# Altium PCB SmartIMU__Pcb.PcbDoc
Units mil, origin at the board's own origin, x right, y up, seen from the top; angles counter-clockwise.
Board outline 680 x 545 mil, 2 copper layers (Top Layer, Bottom Layer); 42 components, 40 nets, 137 pads, 49 vias.
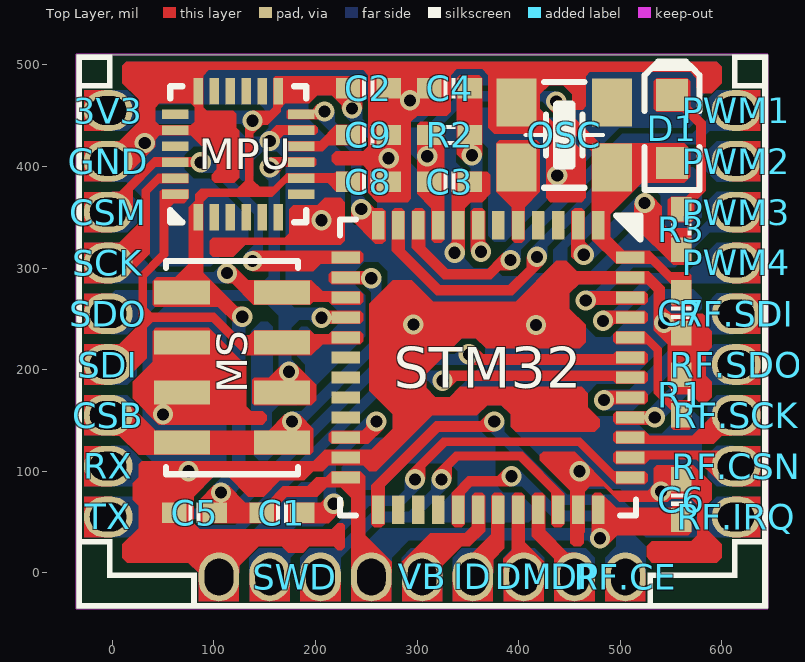
[diagram p0: Top Layer view]
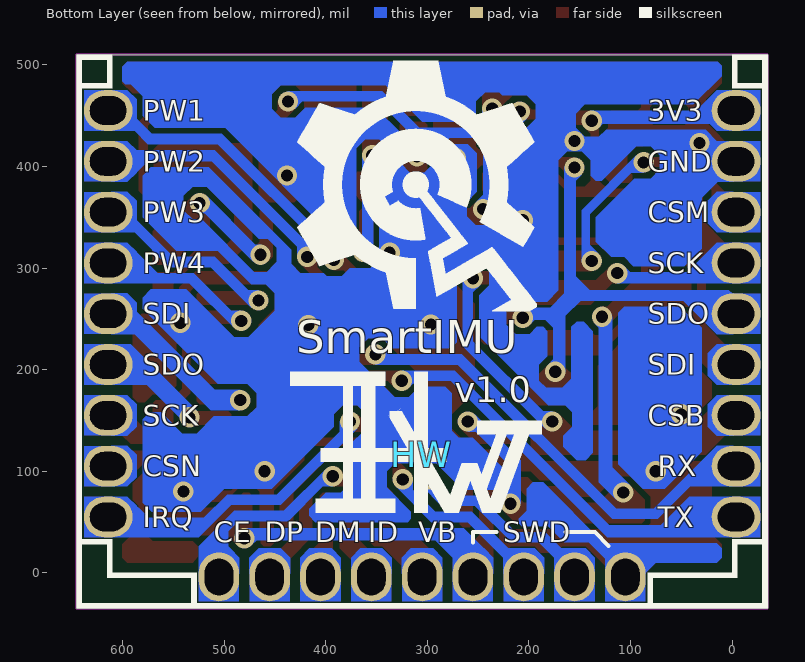
[diagram p1: Bottom Layer view, seen from below]
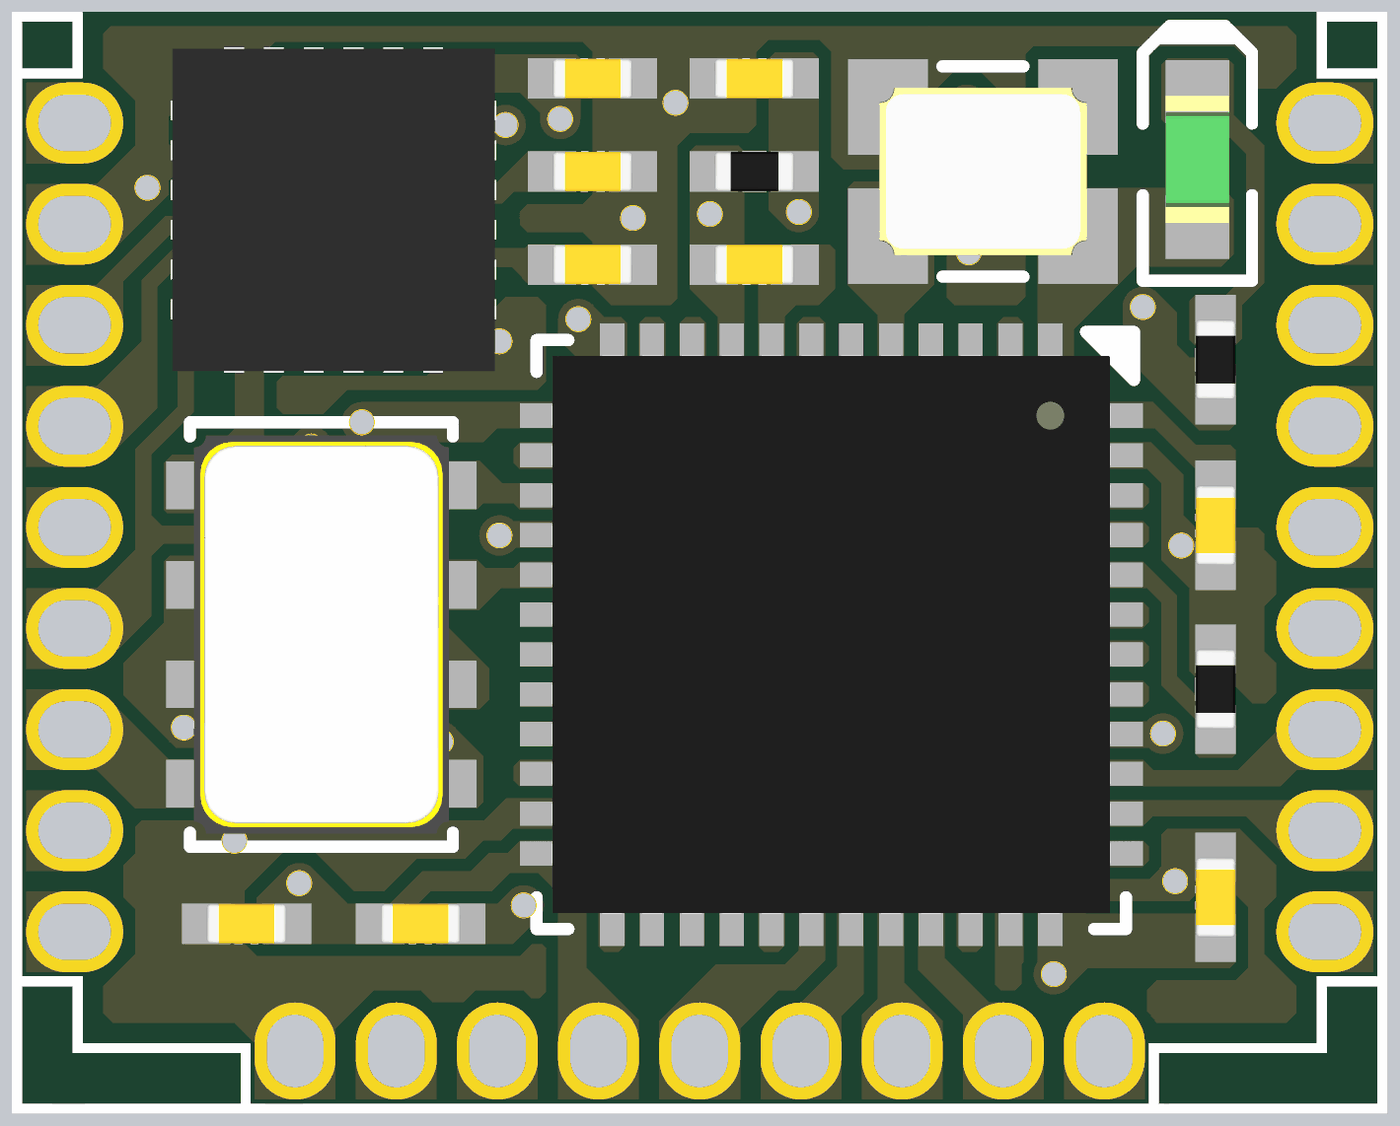
[diagram p2: 3D render of the assembled board from above, using the file's embedded part models]

## Layer stack, top to bottom
Top Solder: solder mask 0.4, Solder Resist, Dk 3.5
Top Layer: signal copper 1.4
Dielectric1: dielectric 12.6, FR-4, Dk 4.8
Bottom Layer: signal copper 1.4
Bottom Solder: solder mask 0.4, Solder Resist, Dk 3.5

## Board outline
-35,-35 645,-35 645,510 -35,510

## Design rules (kind name [scope] priority, off if disabled: settings)
Clearance ClearancePolygon [InPolygon] p1: gap=8
Clearance [All] p2: gap=6
ComponentClearance [All] p1: gap=0 collisioncheckmode=3 verticalgap=0 showdistances=FALSE
HoleToHoleClearance [All] p1: gap=6 allowstackedmicrovias=TRUE
MinimumSolderMaskSliver [All] p1: minsoldermaskwidth=5
PlaneConnect [All] p1: planeconnectstyle=Direct reliefexpansion=20 reliefentries=4 reliefconductorwidth=10 reliefairgap=10
PolygonConnect [All] p1: connectstyle=Direct reliefconductorwidth=10 reliefentries=4 polygonreliefangle="90 Angle" airgapwidth=10
RoutingVias [All] p1: holewidth=12 width=20 viastyle="Through Hole" minholewidth=12 minwidth=20 maxholewidth=28 maxwidth=50
SilkToSilkClearance [All] p1: silktosilkclearance=0
SilkToSolderMaskClearance [IsPad] p1: minsilkscreentomaskgap=1.5 clearancetoexposedcopper=TRUE
SolderMaskExpansion [All] p1: expansion=0
UnConnectedPin [All] p1 off:
Width [All] p1: maxlimit=20 minlimit=6 preferedwidth=10
23 further rules are at their usual default settings.

## Components (designator, comment, footprint, x,y, rotation, side; value= is the part's Value field where it differs from the comment)
3V3 "Pad1X1_1.27" Pad1X1_1.27 0,455 r0 top locked
C1 "Cap_0402" CAP_0402 167,59 r180 top locked
C2 "Cap_0402" CAP_0402 252,477 r0 top locked
C3 "Cap_0402" CAP_0402 332,385 r0 top locked
C4 "Cap_0402" CAP_0402 332,477 r180 top locked
C5 "Cap_0402" CAP_0402 81,59 r180 top locked
C6 "Cap_0402" CAP_0402 560,72 r90 top locked
C7 "Cap_0402" CAP_0402 560,256 r270 top locked
C8 "Cap_0402" CAP_0402 252,385 r0 top locked
C9 "Cap_0402" CAP_0402 252,431 r0 top locked
CSB "Pad1X1_1.27" Pad1X1_1.27 0,155 r0 top locked
CSM "Pad1X1_1.27" Pad1X1_1.27 0,355 r0 top locked
D1 "LED_0603_GREEN" LED_0603_GREEN 551,437 r90 top locked
DM "Pad1X1_1.27" Pad1X1_1.27 405,0 r90 top locked
DP "Pad1X1_1.27" Pad1X1_1.27 455,0 r90 top locked
GND "Pad1X1_1.27" Pad1X1_1.27 0,405 r0 top locked
HW "HW" Logo_HW_v2.0 306,116 r180 bottom
ID "Pad1X1_1.27" Pad1X1_1.27 355,0 r90 top locked
MPU "MPU9250" MPU9250 124,412 r90 top locked
MS "MS5611" MS5611 118,202 r0 top locked
OSC "OSC_3225" OSC_3225 445,431 r180 top locked
PWM1 "Pad1X1_1.27" Pad1X1_1.27 610,455 r180 top locked
PWM2 "Pad1X1_1.27" Pad1X1_1.27 610,405 r180 top locked
PWM3 "Pad1X1_1.27" Pad1X1_1.27 610,355 r180 top locked
PWM4 "Pad1X1_1.27" Pad1X1_1.27 610,305 r180 top locked
R1 "Res_0402" RES_0402 560,175 r270 top locked
R2 "Res_0402" RES_0402 332,431 r180 top locked
R3 "Res_0402" RES_0402 560,338 r270 top locked
RF.CE "Pad1X1_1.27" Pad1X1_1.27 505,0 r90 top locked (schematic designator NRF_CE)
RF.CSN "Pad1X1_1.27" Pad1X1_1.27 610,105 r180 top locked
RF.IRQ "Pad1X1_1.27" Pad1X1_1.27 610,55 r180 top locked
RF.SCK "Pad1X1_1.27" Pad1X1_1.27 610,155 r180 top locked
RF.SDI "Pad1X1_1.27" Pad1X1_1.27 610,255 r180 top locked
RF.SDO "Pad1X1_1.27" Pad1X1_1.27 610,205 r180 top locked
RX "Pad1X1_1.27" Pad1X1_1.27 0,105 r0 top locked
SCK "Pad1X1_1.27" Pad1X1_1.27 0,305 r0 top locked
SDI "Pad1X1_1.27" Pad1X1_1.27 0,205 r0 top locked
SDO "Pad1X1_1.27" Pad1X1_1.27 0,255 r0 top locked
STM32 "STM32F401C" STM32_QFN48 370,202 r270 top locked
SWD "Pad1X4_1.27_SWD" Pad1X4_1.27 255,0 r180 top locked
TX "Pad1X1_1.27" Pad1X1_1.27 0,55 r0 top locked
VB "Pad1X1_1.27" Pad1X1_1.27 305,0 r90 top locked

## Footprints (in the part's own frame and the unit in brackets; to place one, negate y for a bottom-side part, rotate by r counter-clockwise, add the part's x,y. Pads: shape width x height; smd on the part's side, far side on the other; paste and mask are expansions set on the pad)
CAP_0402 [mil] "Chip Capacitor, Body 1.0x0.5mm, 0402, IPC Medium Density"
  rect 24x20 smd: 1(-20,0) 2(20,0)
  Top Layer pour cut-out: -7.87,13.78 7.87,13.78 7.87,-13.78 -7.87,-13.78
  silkscreen extent -6,-10 6,10, body extent -20,-10 20,10, height 22
LED_0603_GREEN [mm] "Chip Capacitor, 2-Leads, Body 1.6x0.8mm, IPC Medium Density"
  rect 0.8x0.8 smd: 1(-0.85,0) 2(0.85,0)
  Top Layer pour cut-out: -0.5,0.5 0.5,0.5 0.5,-0.5 -0.5,-0.5
  silkscreen extent -1.52,-0.69 1.68,0.69, body extent -0.8,-0.4 0.8,0.4, height 0.75
Logo_HW_v2.0 [mil]
  silkscreen extent -129,-57 119,82
MPU9250 [mil] "QFN, 24-Leads, Body 3.00x3.00mm, Pitch 0.40mm, Thermal Pad 1.54x1.70mm, IPC Medium Density"
  rect 26x9 smd: 1(-62.01,39.37) 2(-62.01,23.62) 3(-62.01,7.87) 4(-62.01,-7.87) 5(-62.01,-23.62) 6(-62.01,-39.37) 13(62.01,-39.37) 14(62.01,-23.62) 15(62.01,-7.87) 16(62.01,7.87) 17(62.01,23.62) 18(62.01,39.37)
  rect 9x26 smd: 7(-39.37,-62.01) 8(-23.62,-62.01) 9(-7.87,-62.01) 10(7.87,-62.01) 11(23.62,-62.01) 12(39.37,-62.01) 19(39.37,62.01) 20(23.62,62.01) 21(7.87,62.01) 22(-7.87,62.01) 23(-23.62,62.01) 24(-39.37,62.01)
  silkscreen extent -67,-67 67,67, body extent -81,-81 81,81, height 31
MS5611 [mm] "QFN, 8-Leads, Body 5.00x3.00mm, Pitch 1.25mm/0.00mm, Thermal Pad 4.35x0.00mm, IPC Medium Density"
  rect 1.4x0.6 smd: 1(-1.25,1.875) 2(-1.25,0.625) 3(-1.25,-0.625) 4(-1.25,-1.875) 5(1.25,-1.875) 6(1.25,-0.625) 7(1.25,0.625) 8(1.25,1.875)
  silkscreen extent -1.65,-2.67 1.65,2.67, body extent -1.6,-2.5 1.6,2.5, height 1
OSC_3225 [mil] "Molded Capacitor, 2-Leads, Body 5.0x3.2mm, IPC Medium Density"
  rect 39.37x47.24 smd: 1(-47,-32) 2(47,-32) 3(47,32) 4(-47,32)
  silkscreen extent -38,-52 38,52, body extent -51,-41 51,41, height 22
Pad1X1_1.27 [mil] "Connector; Header; 2 Position"
  oval 48x40 hole 28 slot 36 at 0 deg mask+0: 1(-4,0)
  Multi-Layer region: -28,-20 0,-20 0,20 -28,20
Pad1X4_1.27 [mil] "Connector; Header; 2 Position"
  oval 40x48 hole 28 slot 36 at 90 deg mask+0: 1(0,4) 2(50,4) 3(100,4) 4(150,4)
  Multi-Layer region: -20,28 -20,0 20,0 20,28
  Multi-Layer region: 30,28 30,0 70,0 70,28
  Multi-Layer region: 80,28 80,0 120,0 120,28
  Multi-Layer region: 130,28 130,0 170,0 170,28
RES_0402 [mil] "Chip Resistor, Body 1.0x0.5mm, EIA 0402, IPC Medium Density"
  rect 24x20 smd: 1(-20,0) 2(20,0)
  Top Layer pour cut-out: -7.87,13.78 7.87,13.78 7.87,-13.78 -7.87,-13.78
  silkscreen extent -6,-10 6,10, body extent -20,-10 20,10, height 16
STM32_QFN48 [mil] "QFN, 48-Leads, Body 7.00x7.00mm, Pitch 0.50mm, Thermal Pad 5.80x5.80mm, IPC Medium Density"
  rect 28x12 smd: 1(-140,108.27) 2(-140,88.58) 3(-140,68.9) 4(-140,49.21) 5(-140,29.53) 6(-140,9.84) 7(-140,-9.84) 8(-140,-29.53) 9(-140,-49.21) 10(-140,-68.9) 11(-140,-88.58) 12(-140,-108.27) 25(140,-108.27) 26(140,-88.58) 27(140,-68.9) 28(140,-49.21) 29(140,-29.53) 30(140,-9.84) 31(140,9.84) 32(140,29.53) 33(140,49.21) 34(140,68.9) 35(140,88.58) 36(140,108.27)
  rect 12x28 smd: 13(-108.27,-140) 14(-88.58,-140) 15(-68.9,-140) 16(-49.21,-140) 17(-29.53,-140) 18(-9.84,-140) 19(9.84,-140) 20(29.53,-140) 21(49.21,-140) 22(68.9,-140) 23(88.58,-140) 24(108.27,-140) 37(108.27,140) 38(88.58,140) 39(68.9,140) 40(49.21,140) 41(29.53,140) 42(9.84,140) 43(-9.84,140) 44(-29.53,140) 45(-49.21,140) 46(-68.9,140) 47(-88.58,140) 48(-108.27,140)
  silkscreen extent -150,-146 146,150, body extent -138,-138 138,138, height 31

## Part data
3V3 CSB CSM DM DP GND ID PWM1 PWM2 PWM3 PWM4 RF.CE RF.CSN RF.IRQ RF.SCK RF.SDI RF.SDO RX SCK SDI SDO SWD TX VB: "Header"
C1 C2 C3 C4 C5 C6 C7 C8 C9: "Capacitor"
D1: "LED"
HW: "Logo"
MPU MS: "Sensor"
OSC: "Crystal Oscillator"
R1 R2 R3: "Resistor"
STM32: "MCU"

## Via types
v1: diameter 20, hole 12, Top Layer to Bottom Layer, 49 vias

## Nets (pads, with @x,y where several pads share a name; then routed paths per layer and width w, separated by ;. In a path a pad name is that pad's centre, name@x,y a point inside that pad or via, vN(x,y) a via of type N, cw(c..) or ccw(c..) an arc to the next point about the centre after c; other vN are vias at no path point)
3V3: 3V3.1 C1.2 C2.1 C3.1 C5.1 C6.1 C7.1 C8.1 D1.1 MPU.1 MPU.8 MPU.13 MS.1 OSC.4 R2.2 STM32.1 STM32.9 STM32.24 STM32.36 STM32.48 SWD.1 | length 1839.1
  Top Layer w6: MPU.1 84.63,364.47 95.16,375 158,375 170.38,387.38 MPU.8@186.01,387.38 ; 136,375 v1@136,445 ; v1@138,450 150.5,445 163,457.5 MPU.13@163,472.41
  Top Layer w8: MS.1 85,292.03 MPU.1@85,348.5 ; MPU.8 C8.1@230.94,388.38 ; STM32.48 529.73,310.27 560,280 C7.1@560,275.69
  Top Layer w10: MS.1@74.21,275.39 98.61,275.39 122,252 v1(128,252) ; C5.1@100.69,59 C1.2@147.32,59 ; C1.2@148.16,58.16 170,80 199,80 208,89 225.27,89 STM32.24 242,81.73 242,14 SWD.1@255,1 ; MPU.13@164.37,480.01 C2.1@230.32,480.01 ; R2.2@312.32,431 312.32,385 312.32,374 320.79,365.53 STM32.9 ; v1@478.27,29.73 STM32.36 ; OSC.4@478.27,385.27 STM32.1 478.27,332.73 500.73,310.27 STM32.48
  Bottom Layer w6: 3V3.1 3V3.1@1,450
  Bottom Layer w10: 3V3.1@1,450 v1@138,450 ; v1(107,79) 123,95 v1@123,252 ; v1@233,453 253,433 310,433 ; SWD.1@257,5 290,38 472,38 v1@479,31 ; v1(310,410) 310,433 ; v1@437,469 346,469 310,433
  other v1: 480,34 138,445 236,457 437,464
BOOT: R1.2 STM32.44 | length 105.5
  Top Layer w7: STM32.44@510.53,231 525.5,231 537,219.5 537,179 R1.2@560.34,155.66
  Top Layer w10: STM32.44 STM32.44@510.53,231
CLK: OSC.3 STM32.5 | length 55.5
  Top Layer w10: STM32.5 OSC.3@399.53,397.47
CSB: CSB.1 MS.4 MS.5 STM32.14 | length 390.1
  Top Layer w8: STM32.14 v1@255.42,290.58
  Top Layer w10: CSB.1@1,155 27.82,128.18 MS.5@172.21,128.18
  Bottom Layer w8: v1(177,149) 184,149 261,226 261,284 v1(255,290)
CSM: CSM.1 MPU.22 STM32.13 | length 327.8
  Top Layer w6: CSM.1@-4.05,358.08 42,404.13 v1@87,404.13
  Top Layer w8: CSM.1 CSM.1@-4,357.08 ; v1@140,305 v1@143,308 ; v1@143,311 STM32.13@229,311 ; STM32.13@229.27,311 STM32.13
  Bottom Layer w8: v1@90,409 144,355 v1@144,307
  other v1: 138,307 87,404
FFC_CS: STM32.21
FFC_IO1: STM32.18
FFC_IO2: STM32.19
FFC_IO3: STM32.20
FFC_MISO: STM32.27
FFC_MOSI: STM32.28
FFC_SCK: STM32.26
GND: C2.2 C3.2 C4.2 C5.2 C6.2 C7.2 C8.2 C9.2 GND.1 MPU.11 MPU.18 MPU.20 MS.2 MS.3 OSC.2 R1.1 STM32.8 STM32.23 STM32.35 STM32.47 SWD.4 | length 2240.2
  Top Layer w6: 86.37,104.37 199.37,104.37 208.42,113.42 STM32.23
  Top Layer w8: v1@156,425 166.62,435.62 MPU.11
  Top Layer w10: GND.1@1,405 GND.1@6.38,405 ; MS.3@73.79,177.39 MS.2@73.79,226.61 ; 86.37,104.37 61.32,79.32 61.32,59 61.32,44.68 SWD.4@105,1 ; C8.2@271.69,386 271.69,431 271.69,476 C4.2@312.32,476 ; v1(296.39,244.39) 410.39,244.39 456.58,290.58 STM32.47 ; STM32.8@340,341.53 STM32.8 340.47,374.79 C3.2@351.69,386 ; OSC.2 438,423 v1(438,391) ; STM32.35 458.58,85.58
  Bottom Layer w8: v1@34,425 180,425 203,402 203,350 238,315 v1(337,315)
  Bottom Layer w10: 180,425 180,458 209,487 271,487 v1(293,465) 323,495 469,495 480,484 480,433 v1(438,391) 392,437 346,437 333,424 333,392 322,381 299,381 v1(272,408) ; v1(296.39,244.39) 337,285 v1(337,315) ; v1(417,244) 458,203 v1@458,100
  other v1: 540,80 75,100 460,100 50,156 543,246 206,347 32,423 155,425
INT: MPU.12 STM32.12 | length 129.4
  Top Layer w10: v1(245,358) 261,342 STM32.12
  Bottom Layer w10: v1@206,450 240,416 v1@240,358
  other v1: 209,454
LED: R3.2 STM32.2 | length 31.2
  Top Layer w10: STM32.2 458.58,318.42 v1(464,313)
  other v1: 524,364
NetD1_2: D1.2 R3.1 | length 131.2
  Top Layer w8: D1.2 579.75,441.72 579.75,378.43 R3.1@560.5,359.19
NRF_CE: RF.CE.1 STM32.29 | length 250.9
  Top Layer w8: STM32.29 340.47,79.47 351,90 v1@393,90
  Bottom Layer w10: v1(393,95) 400,95 439,56 488,56 501,43 RF.CE.1@501,-4
NRF_CSN: RF.CSN.1 STM32.38 | length 121.5
  Top Layer w8: STM32.38 512.58,116 603,116 RF.CSN.1 RF.CSN.1@605.58,113.42
NRF_IRQ: RF.IRQ.1 STM32.25 | length 450.2
  Top Layer w10: STM32.25 261.73,85.73 320,144 371,144 v1(376,149)
  Bottom Layer w10: v1(376,149) 376,142 446,72 495,72 518,49 608,49 RF.IRQ.1
NRF_SCK: RF.SCK.1 STM32.39 | length 111.8
  Top Layer w8: STM32.39@512.1,131 577,131 601,155 RF.SCK.1
NRF_SDI: RF.SDI.1 STM32.41 | length 165.2
  Bottom Layer w10: v1(484,170) 510,170 595,255 RF.SDI.1
NRF_SDO: RF.SDO.1 STM32.40 | length 125.6
  Top Layer w10: STM32.40 533.79,152.79 v1(534,153)
  Bottom Layer w10: v1(534,153) 586,205 RF.SDO.1
PWM1: PWM1.1 STM32.10 | length 128.2
  Top Layer w10: STM32.10@303,342 303,319 328,294 371,294 385,308 v1(392,308)
PWM2: PWM2.1 STM32.11 | length 194.5
  Top Layer w10: STM32.11@283,342 283,316 321,278 392,278 418,304 v1(418,311)
PWM3: PWM3.1 STM32.46
  other v1: 466,268
PWM4: PWM4.1 STM32.45
  other v1: 483,248
REG: C9.1 MPU.10 | length 50.9
  Top Layer w8: MPU.10 205.87,419.87 217,431 C9.1@232.32,431
RST: C4.1 R2.1 STM32.7 | length 86.7
  Top Layer w10: R2.1@351.69,431 C4.1@351.69,476 ; v1(354,411) R2.1@354,428.69 ; v1@361,318 STM32.7@361,342
  other v1: 363,316
RX: RX.1 STM32.43 | length 180.4
  Top Layer w10: v1(351,215) 356,210 STM32.43@510,210
  Bottom Layer w10: 333.7,210 346,210 v1(351,215)
SCK: MPU.23 MS.8 SCK.1 STM32.15 | length 199.9
  Top Layer w8: MS.8@148.18,275.82 MS.8@172.21,275.82
  Top Layer w10: MS.8@177.13,272 228.9,272 STM32.15
  Bottom Layer w8: SCK.1 SCK.1@7,294 ; SCK.1@7,290 v1@114,290
  other v1: 113,295
SDI: MPU.24 MS.7 SDI.1 STM32.17 | length 413.7
  Top Layer w6: SDI.1@2.2,203.8 30,231.59 30,293 51,314 51,360.64 MPU.24@61.99,371.63 ; 30,251 100,251 121,230 MS.7@168.82,230
  Top Layer w8: MS.7@168.82,230 MS.7@172.21,226.61
  Top Layer w10: SDI.1@1,205 SDI.1@2.2,203.8 ; MS.7@158.61,226.61 MS.7@172.21,226.61 ; MS.7@177.13,230 228.47,230 STM32.17
SDO: MPU.9 MS.6 SDO.1 STM32.16 | length 441.8
  Top Layer w8: v1@159.13,404.13 MPU.9
  Bottom Layer w10: SDO.1 27,255 45,273 160,273 ; v1@160,399 160,273 ; v1(174,198) 170,202 170,248 175.5,253.5 ; v1(206,251) 202,255 173,255 160,268 160,273
  other v1: 155,399
SWC: STM32.37 SWD.3 | length 246.6
  Top Layer w8: v1(298,92) 298,100 327,129 459.5,129 494.77,93.73 STM32.37
SWD: STM32.34 SWD.2 | length 160.5
  Top Layer w8: v1(324,92) 324,100 339,115 402,115 436,81 436,64.9 STM32.34
TX: STM32.42 TX.1 | length 187.1
  Top Layer w10: v1(325,189) 330,194 STM32.42@510,194
USB_DM: DM.1 STM32.32 | length 55.5
  Top Layer w10: DM.1@399.53,6.47 STM32.32
USB_DP: DP.1 STM32.33 | length 80.8
  Top Layer w10: STM32.33 419.21,39.79 455,4 DP.1
USB_ID: ID.1 STM32.31 | length 71.3
  Top Layer w10: ID.1@355,1 379.84,25.84 STM32.31
USB_VBUS: STM32.30 VB.1 | length 99.1
  Top Layer w10: VB.1@305,1 305,15 323,33 349,33 360.16,44.16 STM32.30
VCAP: C1.1 STM32.22
  other v1: 218,68 260,149
pads on no net: MPU.2 MPU.3 MPU.4 MPU.5 MPU.6 MPU.7 MPU.14 MPU.15 MPU.16 MPU.17 MPU.19 MPU.21 OSC.1 STM32.3 STM32.4 STM32.6

## Keep-outs
Keep-Out Layer:
  the board outline again, w2

## Other copper
Top Layer:
  region net SDO: 138,190 140,192 154,192 167,205 174,198 181,205 201,185 201,170 196,165 140,165 138,167
  region net GND: 178,362 202,362 209,369 225,369 229,365 229,327 225,323 131,323 119,311 99,311 96,314 96,327 99,330 170,330 174,334 174,358
  region net INT: 269,356 266,359 258,359 252,365 245,358 235,358 235,348 259,324 266,324 269,327
  region net REG: 244,441 246,439 246,423 244,421 213,421 207.1,415.1 171.9,415.1 171,416 171,424 172,425 204,425 220,441
  region net REG: 172,424.75 199,424.75 199,415.25 172,415.25
  region net GND: 95,241 43,241 40,238 40,208 20,188 20,172 46,146 148,146 152,150 152,155 148,159 137,159 132,164 132,204
  region net CSB: 0,168 15,168 43,140 154,140 170,156 177,149 184,156 198,142 198,119 195,116 26,116 7,135 0,135
  region net SCK: 75,383.5 46.5,383.5 37,374 37,314 13,290 0,290 0,325 7,325 29,347 29,377 45,393 75,393
  region net GND: 76,430.74 49,430.74 49,440.24 76,440.24
  region net CSM: 87,399.5 43,399.5 20,376.5 20,355 0,355 0,375 7,375 41,409 87,409
  region net 3V3: 75.2,359.7 81.5,366 81.5,372.5 87,378 123,378 131,386 131,438 138,445 138,455 155,455 158.5,458.5 158.5,487 160.5,489 244,489 246,487 246,457 226,457 226,460 216,470 202,470 194,462 170.5,462 166,457.5 166,454 153,441 148,441 139,432 139,386 145,380 158.7,380 171.9,393.2 218.7,393.2 220.5,395 244.5,395 246,393.5 246,376.7 244.4,375.1 220.4,375.1 212.14,383.75 171.08,383.78 157.3,370 94.4,370 89.5,365.1 89.5,295.5 123,262 128,262 128,252 121,245 104,262 42,262 40,264 40,287 44,291 62,291 75.2,304.2
  region net SDI: 49,377.5 75,377.5 75.5,377 75.5,368.5 71,364 60.5,364 55,358.5 55,312 34,291 34,261 39,256 101,256 123,234 135,234 140,239 195,239 199,235 213,235 216,238 244,238 247,235 247,228 244,225 207,225 196,214 131,214 98,247 40,247 34,241 34,211 15,192 0,192 0,225 7,225 26,244 26,294 47,315 47,375.5
  region net SDO: 155,409 199,409 201,407 201,401.5 199,399.5 169.5,399.5 162,392 155,399
  region net GND: 161.5,440.5 200,440.5 202.5,438 202.5,433.5 200,431 169,431 159,421 155,425 155,434
  region net INT: 173,456 197,456 202,461 209,454 203.5,446.5 173,446.5 172,447.5 172,455
  region net GND: 333,454 333,490 339,496 364,496 370,490 370,438 376,432 421,432 427,426 427,369 431,365 462,365 466,369 466,412 421,457 421,471 430,480 444,480 453,471 453,459 456,456 463,456 466,459 466,489 470,493 569,493 575,487 575,478 581,472 590,472 600,482 600,498 595,503 14,503 10,499 10,482 26,466 26,444 17,435 41,435 46.5,440.5 42.5,444.5 42.5,458 46.5,462 77.5,462 81,458.5 81,444 77.5,440.5 46.5,440.5 41,435 17,435 7,425 0,425 0,390 13,390 42.5,419.5 42.5,426.5 46.5,430.5 77.5,430.5 88,420 94,420 103,411 103,397 98,392 98,387 101,384 120,384 125,389 125,435.03 122,438.04 122,452 119,455 93,455 89.5,458.5 89.5,489.5 95,495 247,495 252,490 252,420 247,415 220,415 216,411 216,405 220,401 247,401 252,396 252,374 261,365 291,365 294,368 294,444 300,450 329,450
  region net RST: 364,487 361,490 342,490 339,487 339,412 347,404 354,411 364,411
  region net NetD1_2: 547,348 550,345 570,345 573,348 573,365 584,376 584,444 569,459 569,484 566,487 536,487 533,484 533,457 536,454 561,454 575,440 575,380 565,370 550,370 547,367
  region net LED: 570,336 567,339 547,339 541,345 541,361 531,371 524,364 514,364 514,341 552,303 567,303 570,306
  region net 3V3: 570,293 567,296 550,296 529,317 504,317 490,331 490,353 521,384 563,384 569,390 569,417 563,423 480,423 447,456 447,464 437,464 430,457 472,415 472,328 496,304 530,304 550,284 550,264 553,261 567,261 570,264
  region net GND: 547,225 547,184 555,176 570,176 578,168 585,168 590,173 590,188 584,194 584,216 590,222 590,238 584,244 584,252 581,255 550,255 544,261 544,281 528,297 457,297 447,307 437,307 397,267 316,267 295,288 276,288 253,265 253,179 276,156 276,142 255,121 209,121 198,110 29,110 26,107 26,94 20,88 20,72 26,66 26,44 10,28 10,15 15,10 75,10 85,0 125,0 125,7 144,26 167,26 173,20 188,20 194,26 218,26 222,22 226,22 229,25 229,47 227,49 222,49 216,43 86,43 80,49 80,75 100,95 114,95 134,75 149,75 165,91 189,91 198,100 207,100 213,106 247,106 253,100 260,100 315,155 359,155 369,165 383,165 392,156 392,144 397,139 475,139 480,144 480,151 468,163 468,177 462,183 342,183 332,173 318,173 309,182 309,196 344,231 358,231 368,221 460,221 466,227 466,244 450,260 450,275 459,284 526,284 533,277 533,239
  region net 3V3: 570,64 567,67 553,67 550,64 496,64 481,79 475,79 472,76 472,34 480,34 487,27 497,37 567,37 570,40
  region net GND: 527,81 493,81 455,119 424,119 421,116 421,111 451,81 451,29 454,26 461,26 464,29 464,39 465,40 465,80 470,85 484,85 499,70 547,70 550,73 570,73 576,67 576,37 570,31 531,31 526,26 526,16 530.8,10 595,10 600,15 600,28 584,44 584,66 590,72 590,88 572,106 536,106 533,103 533,87
  region net SWC: 494,100 461,133 325,133 291,99 298,92 308,92 308,104 329,125 458,125 496,87 524,87 527,90 527,97 524,100
  region net GND: 464.8,76 451.8,76 451.8,48 464.8,48
  region net SWD: 445,78 404,119 337,119 317,99 324,92 334,92 334,104 341,111 400,111 432,79 432,48 435,45 442,45 445,48
  region net USB_DP: 426,76 423,79 416,79 413,76 413,36 435,14 435,0 475,0 456,20 448,20 426,42
  region net USB_DM: 406,76 403,79 396,79 393,76 393,22 385,14 385,0 425,0 425,11 406,30
  region net USB_ID: 386,76 383,79 376,79 373,76 373,38 335,0 375,0 375,13 386,24
  region net USB_VBUS: 367,76 364,79 357,79 354,76 354,46 347,39 313,39 285,11 285,0 325,0 325,7 344,26 352,26 367,41
  region net NRF_CE: 347,78 354,85 393,85 393,95 386,102 379,95 350,95 334,79 334,48 337,45 344,45 347,48
  region net NRF_IRQ: 268,85 322,139 376,139 376,149 369,156 362,149 318,149 255,86 255,48 258,45 265,45 268,48
  region net 3V3: 249,37 249,95 244,100 216,100 210,94 201,94 192,85 168,85 152,69 131,69 114,86 107,79 100,86 86,72 86,52 89,49 160,49 163,52 163,66 172,75 202,75 211,84 225,84 235,74 235,0 275,0 275,11
  region net VCAP: 252,127 267,142 260,149 250,149 250,144 246,140 216,140 213,137 213,130 216,127
  region net SDO: 244,245 247,248 247,255 244,258 213,258 206,258 206,245
  region net SCK: 244,264 247,267 247,274 244,277 207,277 196,288 134,288 120,302 113,295 113,285 118,285 139,264 195,264 198,267 213,267 216,264
  region net CSB: 255.42,284 255.42,297 216,297 213,294 213,287 216,284
  region net CSM: 244,304 247,307 247,314 244,317 138,317 138,297 198,297 205,304
  region net INT: 255.52,328 268.52,328 268.52,356 255.52,356
  region net PWM2: 275,317 319,273 394,273 425,304 418,311 408,311 408,301 390,283 323,283 288,318 288,356 285,359 278,359 275,356
  region net PWM1: 295,320 326,289 373,289 382,298 392,298 392,308 385,315 369,299 330,299 308,321 308,356 305,359 298,359 295,356
  region net 3V3: 314,328 317,325 324,325 327,328 327,441 324,444 303,444 300,441 300,373 314,359
  region net GND: 334,326 331,323 337,315 347,315 347,359 353,365 364,365 372,373 372,392 369,395 336.09,395 334,392.91
  region net CLK: 393,328 396,325 403,325 406,328 406,360 421,375 421,423 418,426 381,426 378,423 378,375 393,360
  region net LED: 452,311 457,306 471,306 471,320 465,326 465,356 462,359 455,359 452,356
  region net PWM3: 466,277 466,261 473,261 476,264 524,264 527,267 527,274 524,277
  region net PWM4: 483,258 483,241 490,241 494,245 524,245 527,248 527,255 524,258
  region net BOOT: 496,238 493,235 493,228 496,225 526,225 533,218 533,181 533,177 550,160 550,143 552,141 568,141 570,143 570,167 567,170 552,170 541,181 541,221 524,238
  region net RX: 496,218 493,215 365,215 358,222 351,215 351,205 524,205 527,208 527,215 524,218
  region net TX: 325,199 325,189 332,182 339,189 493,189 496,186 524,186 527,189 527,196 524,199
  region net NRF_SDI: 484,179 484,163 491,163 494,166 524,166 527,169 527,176 524,179
  region net NRF_SDO: 496,159 493,156 493,149 496,146 534,146 534,159
  region net NRF_CSN: 496,120 493,117 493,110 496,107 524,107 529,112 575,112 596,91 610,91 610,120
  region net NRF_SCK: 496,140 493,137 493,130 496,127 592,127 600,135 610,135 610,161 597,161 571,135 529,135 524,140
  region net VCAP: 175,69 172,66 172,52 175,49 213,49 225,61 211,75 205,69
  region net RST: 353,316 363,316 370,323 367,326 367,356 364,359 356,359 353,356
Bottom Layer:
  region net NRF_IRQ: 611,75 595,75 586,66 586,44 595,35 611,35
  region net CSM: 87,404 94,411 148,357 148,307 138,307 131,314 140,323 140,353 99,394 87,394
  region net 3V3: 138,445 138,455 35,455 15,475 0,475 0,435 15,435 22,442 127,442 131,438
  region net INT: 209,454 219,454 219,444 245,418 245,372 252,365 245,358 235,358 235,414 202,447
  region net 3V3: 310,410 320,410 320,436 348,464 423,464 430,457 437,464 437,474 344,474 308,438 255,438 246,447 246,457 236,457 229,450 251,428 278,428 303,403
  region net SCK: 0,325 15,325 44,296 100,296 106,302 113,295 113,285 0,285
  region net SDO: 0,275 0,235 15,235 48,268 149,268 164,253 164,198 174,198 181,205 176,210 176,241 184,249 194,249 199,244 206,251 206,261 179,261 165,275 165,399 155,399 148,392 154,386 154,292 140,278 3,278
  region net 3V3: 128,252 118,252 118,104 100,86 114,72 131,89 131,241 135,245
  region net CSB: 265,290 255,290 248,283 255,276 255,228 186,159 177,159 177,149 184,142 265,223
  region net TX: 311,189 277,189 123,35 15,35 15,75 42,75 70,47 121,47 273,199 325,199 325,189 318,182
  region net GND: 106,262 51,262 30,241 30,119 66,83 88,83 112,107 112,256
  region net NRF_CE: 485,15 496,26 496,41 486,51 437,51 403,85 393,85 393,95 400,102 441,61 490,61 525,26 525,15 525,0 485,0
  region net 3V3: 473,27 468,32 292,32 275,15 275,0 235,0 235,15 264,44 480,44 480,34
  region net GND: 222 vertices and 0 holes, not listed, extent 0,50 600,503
  region net LED: 517,371 469,323 464,323 464,313 471,306 519,354 524,354 524,364
  region net PWM3: 588,335 554,301 513,301 473,261 466,268 466,278 476,278 509,311 550,311 586,347 586,366 595,375 610,375 610,335
  region net PWM4: 610,285 534,285 490,241 483,248 483,258 493,258 530,295 565,295 595,325 610,325
  region net NRF_SDO: 527,160 534,153 544,153 576,185 595,185 610,185 610,225 592,225
  region net TX: -1,35 15,35 24,44 24,66 15,75 -1,75
  region net RX: -1,85 15,85 24,94 24,116 15,125 -1,125
  region net CSB: -1,135 15,135 24,144 24,166 15,175 -1,175
  region net SDI: -1,185 15,185 24,194 24,216 15,225 -1,225
  region net SDO: -1,235 15,235 24,244 24,266 15,275 -1,275
  region net SCK: -1,285 15,285 24,294 24,316 15,325 -1,325
  region net CSM: -1,335 15,335 24,344 24,366 15,375 -1,375
  region net GND: -1,385 15,385 24,394 24,416 15,425 -1,425
  region net 3V3: -1,435 15,435 24,444 24,466 15,475 -1,475
  region net GND: 125,-1 125,15 116,24 94,24 85,15 85,-1
  region net SWC: 175,-1 175,15 166,24 144,24 135,15 135,-1
  region net SWD: 225,-1 225,15 216,24 194,24 185,15 185,-1
  region net 3V3: 275,-1 275,15 266,24 244,24 235,15 235,-1
  region net USB_VBUS: 325,-1 325,15 316,24 294,24 285,15 285,-1
  region net USB_ID: 375,-1 375,15 366,24 344,24 335,15 335,-1
  region net USB_DM: 425,-1 425,15 416,24 394,24 385,15 385,-1
  region net USB_DP: 475,-1 475,15 466,24 444,24 435,15 435,-1
  region net NRF_CE: 525,-1 525,15 516,24 494,24 485,15 485,-1
  region net PWM1: 611,475 595,475 586,466 586,444 595,435 611,435
  region net PWM2: 611,425 595,425 586,416 586,394 595,385 611,385
  region net PWM3: 611,375 595,375 586,366 586,344 595,335 611,335
  region net PWM4: 611,325 595,325 586,316 586,294 595,285 611,285
  region net NRF_SDI: 611,275 595,275 586,266 586,244 595,235 611,235
  region net NRF_SDO: 611,225 595,225 586,216 586,194 595,185 611,185
  region net NRF_SCK: 611,175 595,175 586,166 586,144 595,135 611,135
  region net NRF_CSN: 611,125 595,125 586,116 586,94 595,85 611,85
  region net SWD: 314,82 314,92 324,92 331,85 296,50 260,50 225,15 225,0 185,0 185,15 194,24 220,24 256,60 292,60
  region net SWC: 288,82 288,92 298,92 305,85 286,66 253,66 217,30 190,30 175,15 175,0 135,0 135,15 144,24 168,24 184,40 213,40 249,76 282,76
  region net NRF_IRQ: 574,54 520,54 497,77 448,77 386,139 386,149 376,149 369,142 444,67 493,67 525,35 595,35 610,35 610,75 595,75
  region net VCAP: 252,139 220,107 220,80 225,75 218,68 208,68 208,111 253,156 260,149 260,139
  region net RX: 351,205 270,205 118,53 73,53 41,85 15,85 0,85 0,125 15,125 77,63 114,63 266,215 337,215 345,223 351,217
  region net GND: 85,0 75,10 15,10 10,15 10,24 15,29 126,29 186,89 196,89 202,83 202,61 210,53 210,49 207,46 181,46 165,30 141,30 125,14 125,0
  region net PWM1: 392,308 385,315 502,432 571,432 586,447 586,466 595,475 610,475 610,435 588,435 575,422 506,422 402,318 402,308
  region net PWM2: 418,311 411,318 509,416 586,416 595,425 610,425 610,385 595,385 575,405 512,405 428,321 428,311
  region net NRF_SDI: 588,235 513,160 484,160 484,180 509,180 586,257 586,266 595,275 610,275 610,235
  region net RST: 353,316 363,316 370,323 364,329 364,411 354,411 347,404 353,398

## Silkscreen, mask and mechanical layers (free items; w line width, h text height)
Top Overlay:
  region: 0,510 -35,510 -34.98,-35 645,-35 645,510 610,510 610,477 640,477 640,482 615,482 615,505 640,505 640,33 610,33 610,28 640,28 640,-30 532,-30 532,-5 615,-5 615,28 610,28 610,0 527,0 527,-30 83,-30 83,0 0,0 0,28 -5,28 -5,-5 78,-5 78,-30 -30,-30 -30,28 0,28 0,33 -30,33 -30,505 -5,505 -5,482 -30,482 -30,477 0,477
Bottom Overlay:
  drawing of 3072 lines, arcs and shapes, not listed
  text "3V3" at 83,445 h20
  text "PW1" at 580,445 h20
  text "GND" at 83,395 h20
  text "PW2" at 580,395 h20
  text "CSM" at 83,345 h20
  text "PW3" at 580,345 h20
  text "SCK" at 83,295 h20
  text "PW4" at 580,295 h20
  text "SDO" at 83,245 h20
  text "SDI" at 580,245 h20
  text "SmartIMU" at 429,216 h32.5
  text "SDI" at 83,195 h20
  text "SDO" at 580,195 h20
  text "v1.0" at 273,168 h25
  text "CSB" at 83,145 h20
  text "SCK" at 580,145 h20
  text "RX" at 73,95 h20
  text "CSN" at 580,95 h20
  text "TX" at 73,45 h20
  text "IRQ" at 580,45 h20
  text "SWD" at 225,30 h20
  text "VB" at 309,30 h20
  text "ID" at 358,30 h20
  text "DM" at 410,30 h20
  text "DP" at 460,30 h20
  text "CE" at 510,30 h20
Mechanical 13:
  lines w2: 0,0 610,0 610,510 0,510 0,0

## Dimensions
610,0 to 610,510 on Mechanical 13
610,510 to 0,510 on Mechanical 13
645,510 to -35,510 on Mechanical 13
645,-35 to 645,510 on Mechanical 13